# Altium PCB IRIS-FE-01-B.PcbDoc (part 2 of 2)
Units mil, origin at the board's own origin, x right, y up, seen from the top; angles counter-clockwise.
Board outline 2000 x 1540 mil, 6 copper layers (Top Layer 1, GND Plane 2, RF Layer 3, GND Plane 4, Signal Layer 5, Bottom Layer 6), stack 58.468 mil thick; 79 components, 85 nets, 421 pads, 413 vias.
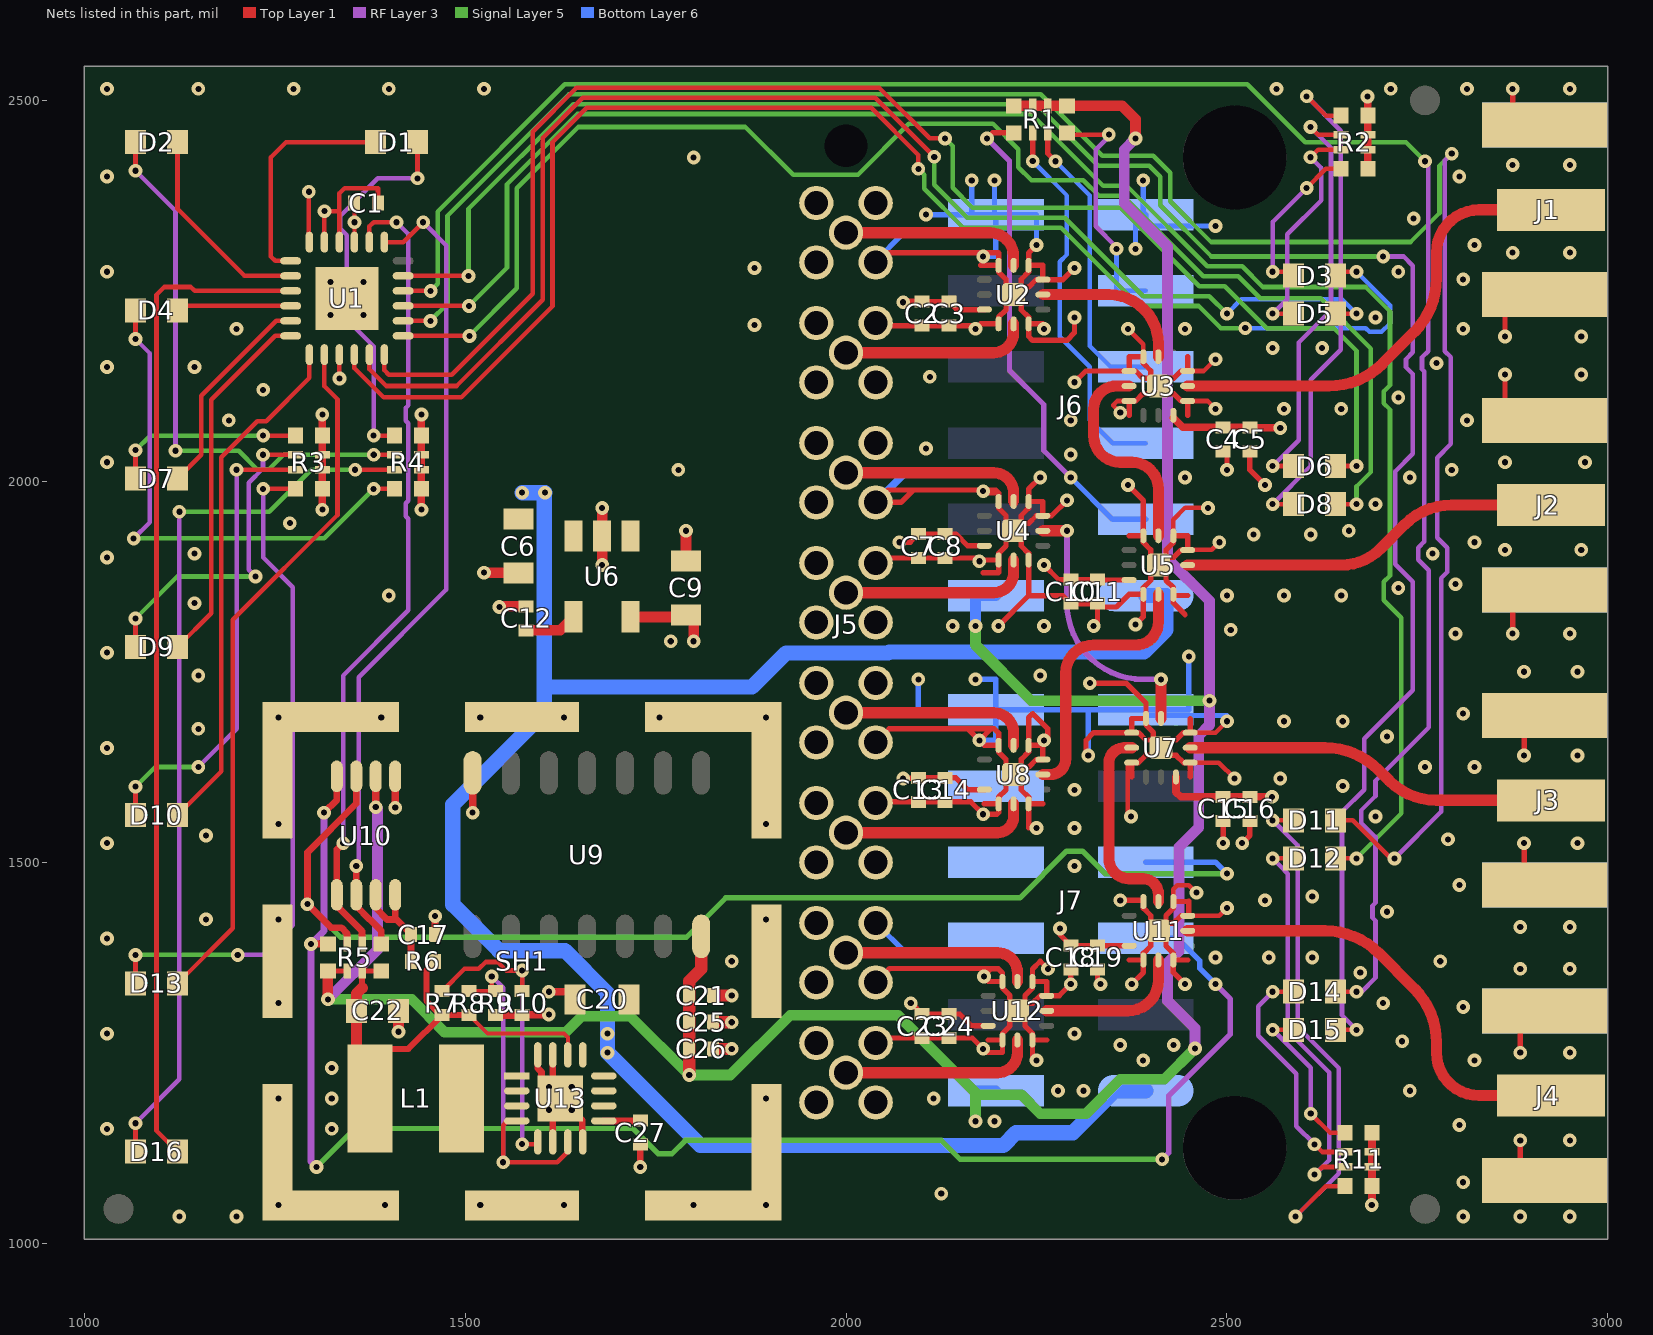
[diagram p6: the nets of this part, all layers, seen from the top]

## Via types
v1: diameter 18, hole 8, Top Layer 1 to Bottom Layer 6, tented both sides, 409 vias
v2: diameter 18, hole 8, Top Layer 1 to Bottom Layer 6, tented bottom, 4 vias

## Nets (pads, with @x,y where several pads share a name; then routed paths per layer and width w, separated by ;. In a path a pad name is that pad's centre, name@x,y a point inside that pad or via, vN(x,y) a via of type N, cw(c..) or ccw(c..) an arc to the next point about the centre after c; other vN are vias at no path point) (continued)
GND: C1.2 C2.2 C3.2 C4.2 C5.2 C6.2 C7.2 C8.2 C9.2 C10.2 C11.2 C12.1 C13.2 C14.2 C15.2 C16.2 C17.1 C18.2 C19.2 C20.1 C21.2 C22.2 C23.2 C24.2 C25.1 C26.2 C27.1 J1.2 J2.2 J3.2 J4.2 J5.GND J6.6 J6.12 J7.6 J7.12 R9.1 R10.1 SH1.SH U1.9 U1.22 U1.23 U1.24 U1.25 U2.3 U2.4 U2.6 U2.10 U2.12 U2.13 U3.3 U3.4 U3.6 U3.10 U3.12 U3.13 U4.3 U4.4 U4.6 U4.10 U4.12 U4.13 U5.3 U5.4 U5.6 U5.10 U5.12 U5.13 U6.2 U7.3 U7.4 U7.6 U7.10 U7.12 U7.13 U8.3 U8.4 U8.6 U8.10 U8.12 U8.13 U9.7 U10.1 U11.3 U11.4 U11.6 U11.10 U11.12 U11.13 U12.3 U12.4 U12.6 U12.10 U12.12 U12.13 U13.6 U13.8 U13.15 U13.16 U13.17 | length 9289.3
  Top Layer 1 w6: v1(1295,2380) 1295,2314.61 U1.24@1295.79,2313.82 ; U1.23@1315.47,2313.82 v1(1315.47,2354.53) 1334.69,2354.53 ; v1(1335.16,2135) U1.9@1335.16,2166.18 ; U1.22@1335.16,2313.82 1335.16,2377.76 1342.24,2384.84 1385.75,2384.84 C1.2@1385.75,2365 ; v1(2360,2090) 2351.07,2098.93 2351.07,2100.49 2355.9,2105.31 U3.6@2371.61,2105.31 ; v1@2370,1560 2370,1625.63 U7.6@2375,1630.63 ; v1(2370,2200) 2390.31,2179.69 U3.3@2390.31,2163.39 ; U11.4@2429.68,1448.39 2429.68,1464.68 2435,1470 2450,1470 v1(2460,1460) ; U5.4@2429.68,1928.39 2429.68,1949.68 2445,1965 v1(2475,1965) ; U11.3@2448.39,1429.69 2489.69,1429.69 v1(2500,1440) ; U5.3@2448.39,1909.69 2448.39,1910 2480,1910 v1(2490,1920) ; U3.10@2448.39,2105.31 2474.69,2105.31 v1(2485,2095) ; U3.12@2448.39,2144.68 2469.68,2144.68 v1(2485,2160) ; U7.10@2451.77,1630.63 2489.37,1630.63 v1(2510,1610) ; U7.12@2451.77,1670 2485,1670 v1(2500,1685)
  Top Layer 1 w7: J5.GND@2039,1262.74 2045.51,1269.25 C23.2@2100,1269.25 C24.2@2135,1269.25 2165.75,1269.25 v1(2180,1255) 2184.69,1250.31 2205.31,1250.31 U12.10@2205.31,1266.61 ; J5.GND@2039,1342.24 2057.26,1360.5 2199.5,1360.5 2200,1360 ; J5.GND@2039,1577.74 2040.51,1579.25 C13.2@2095,1579.25 C14.2@2130,1579.25 2163.75,1579.25 v1(2180,1563) 2198,1563 2200.31,1565.31 U8.10@2200.31,1576.61 ; J5.GND@2039,1657.24 2056.76,1675 2160,1675 ; J5.GND@2039,1892.74 2045.51,1899.25 C7.2@2095,1899.25 C8.2@2130,1899.25 2170.75,1899.25 v1(2175,1895) ; J5.GND@2039,2287.24 2051.76,2300 2200,2300 2200.31,2299.69 U2.6@2200.31,2283.39 ; J5.GND@2042.49,2204.25 C2.2@2100,2204.25 C3.2@2135,2204.25 2165.75,2204.25 v1(2170,2200) 2176.61,2206.61 U2.10@2200.31,2206.61 2200.32,2215.32 2210,2225 2210,2235 U2.13@2220,2245 U2.13@2230,2255 ; v1@2176.61,1896.61 U4.10@2200.31,1896.61 ; 2176.61,2283.39 U2.6@2200.31,2283.39 ; v1@2180,1350 2190,1360 2200,1360 ; 2180,1880 2200,1880 2200.31,1880.31 U4.10@2200.31,1896.61 ; 2181.61,1576.61 U8.10@2200.31,1576.61 ; 2181.61,1653.39 U8.6@2200.31,1653.39 ; 2186.61,1266.61 U12.10@2205.31,1266.61 ; v1@2186.61,1343.39 U12.6@2205.31,1343.39 ; v1(2200,1810) 2239.68,1849.68 ; U2.13@2210,2255 2210,2265 2200.32,2274.69 U2.6@2200.31,2283.39 ; U2.13@2230,2235 2230,2225 2239.69,2215.32 U2.12@2239.68,2206.61 ; U2.3@2249.69,2264.69 2240,2255 U2.13@2230,2255 ; v1(2250,1240) 2244.68,1245.32 U12.12@2244.68,1266.61 ; v1(2250,1545) 2239.68,1545 U8.12@2239.68,1576.61 ; v1(2250,2310) 2239.68,2299.68 U2.4@2239.68,2283.39 ; v1(2255,2005) 2239.68,1989.68 U4.4@2239.68,1973.39 ; 2258.39,1576.61 U8.12@2239.68,1576.61 ; v1@2258.39,2206.61 U2.12@2239.68,2206.61 ; 2263.39,1266.61 U12.12@2244.68,1266.61 ; v1(2265,1360) 2255,1370 2244.68,1359.68 U12.4@2244.68,1343.39 ; v1@2265,1660 2265,1675 2245,1695 2239.68,1689.68 U8.4@2239.68,1653.39 ; v1(2290,1975) 2269.69,1954.69 U4.3@2258.39,1954.69 ; C18.2@2295,1359.25 v1(2295,1340) 2279.69,1324.69 U12.3@2263.39,1324.69 ; v1(2300,2130) 2314.68,2144.68 U3.4@2371.61,2144.68 ; v1(2300,2215) 2300,2195 2290,2185 2245,2185 2239.68,2190.32 U2.12@2239.68,2206.61 ; v1(2300,2280) 2284.69,2264.69 U2.3@2258.39,2264.69 2258.39,2283.39 U2.4@2239.68,2283.39 ; v1@2315,1640 2315,1660 2325,1670 U7.4@2375,1670 ; v1@2315,1735 v1(2320,1735) 2367.4,1735 2393.7,1708.7 U7.3@2393.7,1688.7 ; v1(2325,1810) 2330,1815 C11.2@2330,1839.25 C10.2@2295,1839.25 2284.57,1849.68 2239.68,1849.68 ; v1@2330,1340 C19.2@2330,1359.25 ; 2340,1835 2355,1835 2371.61,1851.61 U5.10@2390.31,1851.61 ; v1(2360,1450) U11.6@2388.7,1450 ; v1(2370,1995) 2390.31,1974.69 U5.6@2390.31,1928.39 ; 2371.61,1371.61 U11.10@2390.31,1371.61 ; 2371.61,1928.39 U5.6@2390.31,1928.39 ; 2371.61,2086.61 U3.6@2371.61,2105.31 2380.31,2105.32 2390,2115 2400,2115 2420,2135 2430,2135 2439.68,2144.69 U3.12@2448.39,2144.68 2448.39,2163.39 ; v1(2375,1340) 2390.31,1355.31 U11.10@2390.31,1371.61 ; 2375,1611.93 U7.6@2375,1630.63 2383.7,1630.63 2393.39,1640.32 2403.39,1640.32 2423.39,1660.32 2433.39,1660.32 2443.07,1670 U7.12@2451.77,1670 2451.77,1688.7 ; v1(2380,1812) 2390.31,1822.31 U5.10@2390.31,1851.61 ; U11.6@2390.31,1448.39 2390.31,1439.69 2400,1430 2400,1420 U11.13@2410,1410 ; v1(2445,1340) 2429.68,1355.32 U11.12@2429.68,1371.61 ; 2445,1825 2429.68,1840.32 U5.12@2429.68,1850 ; 2448.39,1371.61 U11.12@2429.68,1371.61 ; U11.3@2448.39,1429.69 2439.68,1429.69 2430,1420 U11.13@2420,1420 ; 2448.39,1448.39 U11.4@2429.68,1448.39 2429.68,1439.69 2420,1430 U11.13@2420,1420 ; 2448.39,1850 U5.12@2429.68,1850 ; U5.3@2448.39,1909.69 2439.69,1909.69 2430,1900 U5.13@2420,1900 ; U5.3@2448.39,1910 2448.39,1928.39 U5.4@2429.68,1928.39 2429.69,1919.69 2420,1910 U5.13@2420,1900 ; 2448.39,2086.61 U3.10@2448.39,2105.31 2439.68,2105.32 2430,2115 2420,2115 U3.13@2410,2125 U3.13@2400,2135 ; U11.3@2450,1430 2450,1448.7 ; 2451.77,1611.93 U7.10@2451.77,1630.63 2443.07,1630.63 2433.39,1640.32 2423.39,1640.32 U7.13@2413.39,1650.32 U7.13@2403.39,1660.32 ; v1(2495,1525) C15.2@2495,1554.25 ; C4.2@2495,2039.25 2500,2034.25 v1(2500,2015) ; v1(2520,1525) 2530,1535 C16.2@2530,1554.25 ; C5.2@2530,2039.25 2530,2015 v1(2550,1995) ; v1(2865,2140) 2865,2095 2880.03,2079.97 J2.2@2917.32,2079.97 ; v1(2865,2190) 2865,2235 2875.03,2245.03 J1.2@2917.32,2245.03 ; v1(2875,1800) 2875,1850 2882.53,1857.53 J2.2@2917.32,1857.53 ; v1(2875,2515) 2875,2467.47 J1.2@2917.32,2467.47 ; v1(2885,1135) 2885,1090 2892.47,1082.53 J4.2@2917.32,1082.53 ; v1(2885,1250) 2885,1304.97 J4.2@2917.32,1304.97 ; v1(2890,1525) 2890,1480 2899.97,1470.03 J3.2@2917.32,1470.03 ; v1(2890,1640) 2890,1680 2902.47,1692.47 J3.2@2917.32,1692.47 ; 2088.5,1988.5 2072.24,1972.24 J5.GND@2039,1972.24 2055.26,1988.5 2088.5,1988.5 ; 2088.5,1988.5 v1@2178.5,1988.5 ; 2160,1675 v1(2175,1660) 2190,1675 ; 2160,1675 2190,1675 ; v1@2178.5,1988.5 2196.5,1988.5 2200.31,1984.69 ; v1@2178.5,1988.5 v1(2180,1987) 2182.31,1984.69 2200.31,1984.69 ; 2190,1675 2195,1675 2200.31,1669.69 U8.6@2200.31,1653.39 ; 2200,1360 2205.31,1354.69 U12.6@2205.31,1343.39 ; U8.10@2200.31,1576.61 2200.32,1585.32 2210,1595 2210,1605 U8.13@2220,1615 ; U8.6@2200.31,1653.39 2200.32,1644.69 2210,1635 2210,1625 U8.13@2220,1615 ; U4.10@2200.31,1896.61 2200.32,1905.32 2210,1915 2210,1925 U4.13@2220,1935 ; 2200.31,1984.69 U4.6@2200.31,1973.39 2200.32,1964.69 2210,1955 2210,1945 U4.13@2220,1935 ; U12.10@2205.31,1266.61 2205.32,1275.32 2215,1285 2215,1295 U12.13@2225,1305 ; U12.6@2205.31,1343.39 2205.32,1334.69 2215,1325 2215,1315 U12.13@2225,1305 ; U8.13@2220,1615 2230,1605 2230,1595 2239.69,1585.32 U8.12@2239.68,1576.61 ; U8.13@2220,1615 U8.13@2230,1625 ; U4.13@2220,1935 U4.13@2230,1945 ; U4.13@2220,1935 2230,1925 2230,1915 2239.69,1905.32 U4.12@2239.68,1896.61 2239.68,1849.68 ; U12.13@2225,1305 U12.13@2235,1315 ; U12.13@2225,1305 2235,1295 2235,1285 2244.69,1275.32 U12.12@2244.68,1266.61 ; U8.13@2230,1625 2230,1635 2239.69,1644.69 U8.4@2239.68,1653.39 ; U8.13@2230,1625 2240,1625 2249.69,1634.69 U8.3@2258.39,1634.69 2258.39,1653.39 U8.4@2239.68,1653.39 ; U4.13@2230,1945 2240,1945 2249.69,1954.69 U4.3@2258.39,1954.69 ; U4.13@2230,1945 2230,1955 2239.69,1964.69 U4.4@2239.68,1973.39 ; U2.13@2230,2255 2230,2265 2239.69,2274.69 U2.4@2239.68,2283.39 ; U12.13@2235,1315 2245,1315 2254.69,1324.69 U12.3@2263.39,1324.69 ; U12.13@2235,1315 2235,1325 2244.69,1334.69 U12.4@2244.68,1343.39 ; U4.4@2239.68,1973.39 2258.39,1973.39 U4.3@2258.39,1954.69 ; U12.4@2244.68,1343.39 2263.39,1343.39 U12.3@2263.39,1324.69 ; U3.4@2371.61,2144.68 2380.31,2144.69 2390,2135 U3.13@2400,2135 ; U3.4@2371.61,2144.68 2371.61,2163.39 U3.3@2390.31,2163.39 2390.31,2154.69 2400,2145 U3.13@2400,2135 ; U7.4@2375,1670 2375,1688.7 U7.3@2393.7,1688.7 ; U7.4@2375,1670 2383.7,1670 2393.39,1660.32 U7.13@2403.39,1660.32 ; U11.10@2390.31,1371.61 2390.31,1380.32 2400,1390 2400,1400 U11.13@2410,1410 ; U5.10@2390.31,1851.61 2390.32,1860.32 2400,1870 2400,1880 U5.13@2410,1890 ; U5.6@2390.31,1928.39 2390.32,1919.69 2400,1910 2400,1900 U5.13@2410,1890 ; U7.3@2393.7,1688.7 2393.7,1680 2403.39,1670.32 U7.13@2403.39,1660.32 ; U11.13@2410,1410 2420,1400 2420,1390 2429.68,1380.32 U11.12@2429.68,1371.61 ; U11.13@2410,1410 U11.13@2420,1420 ; U5.13@2410,1890 U5.13@2420,1900 ; U5.13@2410,1890 2420,1880 2420,1870 2429.69,1860.32 U5.12@2429.68,1851.61 U5.12@2429.68,1850
  Top Layer 1 w9: C17.1@1460.75,1405 v1(1460.75,1429.25) ; U13.16@1595.47,1249.17 U13.16@1595.47,1247.09 1595.47,1229.53 1600.24,1224.76 1600.24,1214.76 v1(1610,1205) 1615.16,1210.16 U13.15@1615.16,1247.09 ; v1(1610,1175) 1615.16,1169.84 U13.6@1615.16,1132.91 ; v1(1640,1175) 1653.85,1161.15 1653.85,1133.59 U13.8@1654.53,1132.91 ; v1(1730,1100) C27.1@1730,1129.25
  Top Layer 1 w10: v1(1408.39,1571.61) U10.1@1408.39,1612.76 ; v1(1510,1565) U9.7@1510,1617.28 ; R9.1@1540,1299.25 R10.1@1575,1299.25 1575.75,1300 v1(1610,1300) ; v1(1610,1330) C20.1@1644.57,1330
  Top Layer 1 w14: v1(1525,1880) C6.2@1570,1880 ; v1(1545,1835) cw(c1545.75,1835) 1545.75,1835.75 C12.1@1580,1835.75 ; v1(1680,1890) U6.2@1680,1928.15 v1(1680,1965) ; C9.2@1790,1895.43 v1(1790,1935)
  Top Layer 1 w14.67: v1(1412.56,1277.44) C22.2@1412.56,1305
  Top Layer 1 w16: C26.2@1825.75,1255 v1(1850,1255) ; C25.1@1825.75,1290 v1(1850,1290) ; C21.2@1825.75,1325 v1(1850,1325)
  Bottom Layer 6 w7: J5.GND@2039,1420.24 2079.24,1380 2080,1380 ; J5.GND@2042.24,2287.24 J5.GND@2039,2287.24 2039,2289 2075,2325 ; v1(2095,1740) 2095,1700 J7.12@2196.57,1700 ; v1(2105,2350) J6.12@2165,2350 ; v1(2165,2395) J6.12@2165,2350 ; v1(2170,1740) 2196.57,1740 J7.12@2196.57,1700 ; v1(2175,1660) 2196.57,1660 J7.12@2196.57,1700 ; v1(2180,2295) 2196.57,2295 J6.12@2196.57,2350 ; v1(2195,2395) J6.12@2195,2350 ; v1(2250,2310) 2250,2350 J6.12@2196.57,2350 ; v1(2318,1640) 2318,1700 ; v1(2380,2305) 2380,2350 J6.6@2393.43,2350 ; v1(2390,2395) 2390,2353.43 J6.6@2393.43,2350 ; v1(2450,1770) 2450,1700 J7.6@2393.43,1700 ; v1(2485,2335) 2393.43,2335 J6.6@2393.43,2350 ; v1(2500,1685) 2500,1692.5 2393.43,1692.5 J7.6@2393.43,1700 ; J6.12@2165,2350 J6.12@2195,2350 ; J6.12@2195,2350 J6.12@2196.57,2350 ; J7.12@2196.57,1700 2318,1700 ; 2318,1700 J7.6@2393.43,1700
  Bottom Layer 6 w10: J5.GND@2039,1972.24 2075,2008.24
  other v1: 1125,1035 1200,1035 2810,1035 2885,1035 2950,1035 1255,1050 1395,1050 1520,1050 1630,1050 1800,1050 1895,1050 2125,1065 2810,1080 2950,1135 1030,1150 2805,1155 2195,1160 1255,1190 1895,1190 2115,1190 2278.15,1200 2311.85,1200 2740,1200 1640,1205 2390,1240 2825,1240 2950,1250 2360,1260 2430,1260 2730,1265 1030,1275 2300,1275 2810,1310 1255,1315 2705,1315 2334,1340 2181,1350 2675,1355 2885,1360 2950,1360 1850,1370 2780,1370 2485,1375 2555,1375 2612,1375 1030,1400 2885,1415 2950,1415 1160,1425 1255,1425 1895,1425 2710,1435 2550,1450 2612,1455 2805,1470 2300,1495 1030,1525 2960,1525 2790,1530 1160,1535 2300,1545 1255,1550 1895,1550 2374,1560 2695,1560 2300,1595 2652,1600 2570,1610 2760,1625 2825,1625 2960,1640 1030,1650 2260,1660 2710,1665 1150,1675 2575,1685 2652,1685 1255,1690 1390,1690 1520,1690 1630,1690 1755,1690 1895,1690 2810,1695 1150,1745 2255,1745 2890,1750 2960,1750 1030,1775 2800,1800 2950,1800 2505,1805 2140,1810 2260,1810 1145,1840 1400,1850 2500,1850 2575,1850 2650,1850 2725,1860 2800,1865 1030,1900 1145,1905 2770,1905 2865,1910 2965,1910 2825,1920 2535,1930 2610,1930 2660,1935 1270,1945 2695,1970 2445,2005 2740,2005 1780,2015 2795,2015 1030,2025 2865,2025 2970,2025 2295,2035 2105,2043 1190,2080 2295,2080 2815,2080 2575,2095 2650,2095 2725,2110 1235,2120 2110,2137 2965,2140 1030,2150 1145,2150 2775,2155 2560,2175 2625,2175 2965,2190 1200,2200 2260,2200 2445,2200 2810,2200 1880,2205 2695,2215 2810,2265 1030,2275 2725,2275 1880,2280 2875,2300 2950,2300 2825,2310 2745,2345 1030,2400 2805,2400 2875,2415 2950,2415 1800,2425 1030,2515 1150,2515 1275,2515 1400,2515 1525,2515 2565,2515 2715,2515 2815,2515 2950,2515
  other v2: 1323.35,2218.35 1366.65,2218.35 1323.35,2261.65 1366.65,2261.65
I2C_CLK: J7.4 R5.2 U10.3 | length 1673.1
  Top Layer 1 w9: R5.2@1345.16,1392.72 1345.16,1406.47 1337.57,1414.06 1323.94,1414.06 v1(1293,1445) 1293,1513 1357.2,1577.2 U10.3@1357.2,1612.76
  Signal Layer 5 w7: v1(1293,1445) 1336.5,1401.5 1790.42,1401.5 1842.16,1453.24 2228.24,1453.24 2289.5,1514.5 2310.5,1514.5 2340,1485 v1(2500,1485)
  Bottom Layer 6 w7: J7.4@2393.43,1500 2485,1500 v1(2500,1485)
I2C_CLK_C: R5.4 U1.19 U10.6 | length 1084.2
  Top Layer 1 w6: U1.19@1394.21,2313.82 1418.82,2313.82 v1(1445,2340)
  Top Layer 1 w9: v1(1357.2,1495) U10.6@1357.2,1457.24 1357.2,1442.64 1374.77,1425.07 1374.93,1425.07 1389.94,1410.06 R5.4@1389.94,1392.72
  RF Layer 3 w6: v1(1357.2,1495) 1360.5,1498.3 1360.5,1742.87 1475.5,1857.87 1475.5,2309.5 v1(1445,2340)
I2C_DATA: J7.3 R5.1 U10.4 | length 2112
  Top Layer 1 w9: v1(1297.72,1392.72) R5.1@1320.06,1392.72 ; v1(1315,1565) 1331.61,1581.61 U10.4@1331.61,1612.76
  RF Layer 3 w7: v1(2415,1110) 2423.5,1118.5 2423.5,1193.4 2504.5,1274.4 2504.5,1320.5 v1(2485,1340)
  RF Layer 3 w9: v1(1305,1100) 1297.72,1107.28 v1(1297.72,1392.72) 1315,1410 v1(1315,1565)
  Signal Layer 5 w7: v1(1305,1100) 1355.5,1150.5 1720.51,1150.5 1753.77,1117.24 1771.34,1117.24 1789.1,1135 2125,1135 2150,1110 v1(2415,1110)
  Bottom Layer 6 w7: J7.3@2393.43,1400 2435,1400 2464.5,1370.5 2464.5,1360.5 v1(2485,1340)
I2C_DATA_C: R5.3 U1.20 U10.5 | length 1070.2
  Top Layer 1 w6: U1.20@1374.53,2313.82 1374.53,2334.53 1380,2340 v1(1410,2340)
  Top Layer 1 w9: v1(1340,1525) 1331.61,1516.61 U10.5@1331.61,1457.24 1331.61,1442.64 1364.84,1409.41 R5.3@1364.84,1392.72
  RF Layer 3 w6: v1(1340,1525) 1340,1745 1425.5,1830.5 1425.5,1950.94 1422.22,1954.23 1422.22,1971.21 1425.5,1974.49 1425.5,2075.94 1422.22,2079.23 1422.22,2096.21 1425.5,2099.49 1425.5,2324.5 v1(1410,2340)
LED_BLU_A1: D1.1 R4.8 | length 503.2
  Top Layer 1 w6: v1(1380.06,2059.94) R4.8@1407.28,2059.94 ; v1(1437.56,2397.56) D1.1@1437.56,2445
  RF Layer 3 w6: v1(1380.06,2059.94) 1380.06,2176.88 1345,2211.94 1345,2322.97 1335.84,2332.13 1335.84,2347.87 1385.53,2397.56 v1(1437.56,2397.56)
LED_BLU_K1: D1.2 U1.1 | length 304.3
  Top Layer 1 w6: U1.1@1271.18,2289.21 1250.79,2289.21 1245,2295 1245,2425 1265,2445 D1.2@1382.44,2445
LED_GRN_A1: D2.1 R4.7 | length 731.9
  Top Layer 1 w6: v1(1067.44,2407.56) D2.1@1067.44,2445 ; v1(1380.16,2034.84) R4.7@1407.28,2034.84
  RF Layer 3 w6: v1(1067.44,2407.56) 1120,2355 v1(1120,2040)
  Signal Layer 5 w6: v1(1120,2040) 1202.82,2040 1226.97,2015.84 1242.71,2015.84 1261.71,2034.84 v1(1380.16,2034.84)
LED_GRN_A2: D16.1 R4.6 | length 1169
  Top Layer 1 w6: D16.1@1067.44,1120 v1(1067.44,1157.44) ; v1(1355.72,2015.16) R4.6@1407.28,2015.16
  RF Layer 3 w6: v1(1067.44,1157.44) 1125,1215 v1(1125,1960)
  Signal Layer 5 w6: v1(1125,1960) 1243,1960 1298.16,2015.16 v1(1355.72,2015.16)
LED_GRN_K1: D2.2 U1.2 | length 272.6
  Top Layer 1 w6: D2.2@1122.56,2445 1122.56,2357.44 1210.47,2269.53 U1.2@1271.18,2269.53
LED_GRN_K2: D16.2 U1.3 | length 1318.9
  Top Layer 1 w6: D16.2@1122.56,1120 1095,1147.56 1095,2245 1105,2255 1140,2255 1145.16,2249.84 U1.3@1271.18,2249.84
LED_GRN_RFA_A: D5.1 R2.6 | length 308.9
  Top Layer 1 w6: v1(2560,2220) D5.1@2587.44,2220 ; v1(2609.57,2425.22) 2619.57,2435.22 R2.6@2649.57,2435.22
  RF Layer 3 w6: v1(2560,2220) 2579,2239 2579,2324 2623.57,2368.57 2623.57,2411.22 v1(2609.57,2425.22)
LED_GRN_RFA_K: D5.2 U1.11 | length 1786.8
  Top Layer 1 w6: U1.11@1374.53,2166.18 1374.53,2147.09 1396.62,2125 1488.79,2125 1601.79,2238 1601.79,2450.57 1654.41,2503.2 2038.41,2503.2 v1(2115.81,2425.81) ; D5.2@2642.56,2220 v1(2670,2220)
  Signal Layer 5 w6: v1(2115.81,2425.81) 2115.81,2389.19 2159,2346 2287.13,2346 2390.13,2243 2477,2243 v1(2500,2220)
  Bottom Layer 6 w6: v1(2500,2220) 2519,2239 2651,2239 v1(2670,2220)
LED_GRN_RFB_A: D8.1 R2.8 | length 673.8
  Top Layer 1 w6: v1(2560,1970) D8.1@2587.44,1970 ; v1(2604.57,2505.22) 2629.78,2480 R2.8@2649.57,2480
  RF Layer 3 w6: v1(2560,1970) 2610,2020 2610,2133.13 2649.57,2172.7 2649.57,2460.22 v1(2604.57,2505.22)
LED_GRN_RFB_K: D8.2 U1.13 | length 1889.7
  Top Layer 1 w6: U1.13@1418.82,2190.79 v1(1505.79,2190.79) ; D8.2@2642.56,1970 v1(2670,1970)
  Signal Layer 5 w6: v1(1505.79,2190.79) 1568.08,2253.08 1568.08,2384.54 1648.54,2465 1868,2465 1930.76,2402.24 2015.74,2402.24 2082.5,2469 2192.87,2469 2226.16,2435.71 2226.16,2412.29 2243.45,2395 2311.62,2395 2332.04,2374.57 2363.4,2374.57 2468.98,2269 2514.62,2269 2543.62,2240 2623.13,2240 2689,2174.13 2689,2012.13 2670,1993.13 v1(2670,1970)
LED_GRN_RFC_A: D12.1 R11.6 | length 525.1
  Top Layer 1 w6: v1(2560,1505) D12.1@2587.44,1505 ; v1(2615,1090) 2625,1100 R11.6@2655,1100
  RF Layer 3 w6: v1(2560,1505) 2570,1495 2580,1485 2580,1278.38 2634,1224.38 2634,1109 v1(2615,1090)
LED_GRN_RFC_K: D12.2 U1.15 | length 2360.4
  Top Layer 1 w6: U1.15@1418.82,2230.16 v1(1505.16,2230.16) ; D12.2@2642.56,1505 v1(2670,1505)
  Signal Layer 5 w6: v1(1505.16,2230.16) 1555.08,2280.08 1555.08,2389.92 1647.15,2482 2243,2482 2337.43,2387.57 2368.79,2387.57 2474.36,2282 2520,2282 2547,2255 2681.87,2255 2714,2222.87 2714,2125.87 2706,2117.87 2706,2102.13 2714,2094.13 2714,1875.87 2706,1867.87 2706,1844 2729,1821 2729,1564 v1(2670,1505)
LED_GRN_RFD_A: D15.1 R11.8 | length 213.6
  Top Layer 1 w6: v1(2560,1280) D15.1@2587.44,1280 ; v1(2610,1170) 2635.22,1144.78 R11.8@2655,1144.78
  RF Layer 3 w6: v1(2560,1280) 2610,1230 v1(2610,1170)
LED_GRN_RFD_K: D15.2 U1.17 | length 2683.1
  Top Layer 1 w6: U1.17@1418.82,2269.53 v1(1504.53,2269.53) ; D15.2@2642.56,1280 v1(2670,1280)
  RF Layer 3 w6: v1(2670,1280) 2651,1299 2651,1566 2680,1595 2680,1661.87 2744,1725.87 2744,1867.87 2721,1890.87 2721,2012.87 2744,2035.87 2744,2140.75 2735,2149.75 2735,2160.25 2744,2169.25 2744,2282.87 2731.87,2295 v1(2705,2295)
  Signal Layer 5 w6: v1(1504.53,2269.53) 1504.53,2357.76 1641.77,2495 2250,2495 2331,2414 2397.87,2414 2412.43,2399.44 2412.43,2362.32 2479.75,2295 v1(2705,2295)
LED_RED_A1: D4.1 R4.5 | length 685.1
  Top Layer 1 w6: v1(1067.44,2186.73) D4.1@1067.44,2224.17 ; v1(1380.06,1990.06) R4.5@1407.28,1990.06
  RF Layer 3 w6: v1(1065,1925) 1086.44,1946.44 1086.44,2167.73 v1(1067.44,2186.73)
  Signal Layer 5 w6: v1(1065,1925) 1315,1925 v1(1380.06,1990.06)
LED_RED_A2: D7.1 R3.8 | length 255.2
  Top Layer 1 w6: D7.1@1067.44,2003.33 v1(1067.44,2040.77) ; v1(1235.06,2059.94) R3.8@1277.28,2059.94
  Signal Layer 5 w6: v1(1067.44,2040.77) 1086.61,2059.94 v1(1235.06,2059.94)
LED_RED_A3: D9.1 R3.7 | length 431.6
  Top Layer 1 w6: D9.1@1067.44,1782.5 v1(1067.44,1819.94) ; v1(1234.84,2034.84) R3.7@1277.28,2034.84
  RF Layer 3 w6: v1(1225,1875) 1216.06,1883.94 1216.06,1997.93 1234.84,2016.71 v1(1234.84,2034.84)
  Signal Layer 5 w6: v1(1067.44,1819.94) 1122.5,1875 v1(1225,1875)
LED_RED_A4: D10.1 R3.6 | length 618.8
  Top Layer 1 w6: D10.1@1067.44,1561.67 v1(1067.44,1599.11) ; v1(1200.16,2015.16) R3.6@1277.28,2015.16
  RF Layer 3 w6: v1(1150,1625) 1200.16,1675.16 v1(1200.16,2015.16)
  Signal Layer 5 w6: v1(1067.44,1599.11) 1093.33,1625 v1(1150,1625)
LED_RED_A5: D13.1 R3.5 | length 891.4
  Top Layer 1 w6: D13.1@1067.44,1340.83 v1(1067.44,1378.27) ; v1(1235.06,1990.06) R3.5@1277.28,1990.06
  RF Layer 3 w6: v1(1201.73,1378.27) 1235.14,1378.27 1274,1417.13 1274,1861 1235.06,1899.94 v1(1235.06,1990.06)
  Signal Layer 5 w6: v1(1067.44,1378.27) v1(1201.73,1378.27)
LED_RED_K1: D4.2 U1.4 | length 142.6
  Top Layer 1 w6: D4.2@1128.55,2230.16 U1.4@1271.18,2230.16
LED_RED_K2: D7.2 U1.5 | length 279.9
  Top Layer 1 w6: D7.2@1122.56,2003.33 1154,2034.77 1154,2112.38 1252.09,2210.47 U1.5@1271.18,2210.47
LED_RED_K3: D9.2 U1.6 | length 481.8
  Top Layer 1 w6: D9.2@1122.56,1782.5 1167,1826.94 1167,2107 1250.79,2190.79 U1.6@1271.18,2190.79
LED_RED_K4: D10.2 U1.7 | length 683.2
  Top Layer 1 w6: D10.2@1122.56,1561.67 1180,1619.11 1180,2031.75 1227.19,2078.94 1238.94,2078.94 1295.79,2135.79 U1.7@1295.79,2166.18
LED_RED_K5: D13.2 U1.8 | length 919.4
  Top Layer 1 w6: D13.2@1122.56,1340.83 1195,1413.27 1195,1818.13 1332.56,1955.69 1332.56,2107.44 1315.47,2124.53 U1.8@1315.47,2166.18
LED_RED_RFA_A: D3.1 R2.5 | length 216.2
  Top Layer 1 w6: v1(2560,2275) D3.1@2587.44,2275 ; v1(2604.57,2384.9) 2629.78,2410.12 R2.5@2649.57,2410.12
  RF Layer 3 w6: v1@2560,2270 2560,2340.33 v1(2604.57,2384.9)
LED_RED_RFA_K: D3.2 U1.10 | length 1938
  Top Layer 1 w6: U1.10@1354.84,2166.18 1354.84,2148.39 1393.23,2110 1495,2110 1614.79,2229.79 1614.79,2445.19 1659.8,2490.2 2033.03,2490.2 2095,2428.23 v1(2095,2410) ; D3.2@2642.56,2275 v1(2670,2275)
  Signal Layer 5 w6: v1(2095,2410) 2102.81,2402.19 2102.81,2383.81 2153.62,2333 2281.75,2333 2384.75,2230 2463.13,2230 2492.13,2201 v1(2524,2201)
  Bottom Layer 6 w6: v1(2524,2201) 2682.13,2201 2687.13,2196 2702.87,2196 2714,2207.13 2714,2231 v1(2670,2275)
LED_RED_RFB_A: D6.1 R2.7 | length 559.4
  Top Layer 1 w6: v1(2560,2020) D6.1@2587.44,2020 ; v1(2609.57,2464.9) 2619.57,2454.9 R2.7@2649.57,2454.9
  RF Layer 3 w6: v1(2560,2020) 2594,2054 2594,2182.13 2636.57,2224.7 2636.57,2437.9 v1(2609.57,2464.9)
LED_RED_RFB_K: D6.2 U1.12 | length 1932.8
  Top Layer 1 w6: U1.12@1394.21,2166.18 1394.21,2145.79 1400,2140 1482.57,2140 1588.79,2246.21 1588.79,2458.79 1646.2,2516.2 2043.8,2516.2 2110,2450 v1(2130,2450) ; D6.2@2642.56,2020 v1(2670,2020)
  Signal Layer 5 w6: v1(2130,2450) 2140,2440 2140,2385 2166,2359 2360.59,2359 2463.59,2256 2497.13,2256 2552.13,2201 2640.46,2201 2670,2171.46 v1(2670,2020)
LED_RED_RFC_A: D11.1 R11.5 | length 701.6
  Top Layer 1 w6: v1(2560,1555) D11.1@2587.44,1555 ; v1(2590,1035) 2629.9,1074.9 R11.5@2655,1074.9
  RF Layer 3 w6: v1(2560,1555) 2593,1522 2593,1283.77 2647,1229.77 2647,1092 ; v1(2590,1035) 2647,1092 ; 2647,1105 2647,1092
LED_RED_RFC_K: D11.2 U1.14 | length 2837.3
  Top Layer 1 w6: U1.14@1418.82,2210.47 v1(1454.53,2210.47) ; D11.2@2642.56,1555 2665,1555 2720,1500 v1(2720,1505)
  RF Layer 3 w6: v1(2720,1505) 2781,1566 2781,1872.87 2789,1880.87 2789,1912.87 2776,1925.87 2776,2031 2794,2049 2794,2162.87 2786,2170.87 2786,2421 v1(2795,2430)
  Signal Layer 5 w6: v1(1454.53,2210.47) 1477,2232.94 1477,2348.62 1636.38,2508 2255.38,2508 2336.38,2427 2403.25,2427 2425.43,2404.83 2425.43,2367.7 2479.13,2314 2740.87,2314 2779,2352.13 2779,2414 v1(2795,2430) v1@2790,2430
LED_RED_RFD_A: D14.1 R11.7 | length 310.4
  Top Layer 1 w6: v1(2560,1330) D14.1@2587.44,1330 ; v1(2615,1129.68) 2625,1119.68 R11.7@2655,1119.68
  RF Layer 3 w6: v1(2560,1330) 2541,1311 2541,1272.13 2591,1222.13 2591,1153.68 v1(2615,1129.68)
LED_RED_RFD_K: D14.2 U1.16 | length 2746.2
  Top Layer 1 w6: U1.16@1418.82,2249.84 v1(1454.84,2249.84) ; D14.2@2642.56,1330 v1(2670,1330)
  RF Layer 3 w6: v1(2670,1330) 2676.87,1330 2695,1348.13 2695,1423.13 2691,1427.13 2691,1442.87 2695,1446.87 2695,1533.13 2676,1552.13 2676,1567.87 2695,1586.87 2695,1606.87 2765,1676.87 2765,1883.13 2751,1897.13 2751,1912.87 2759,1920.87 2759,2144.13 2756,2147.13 2756,2162.87 2764,2170.87 2764,2416 v1(2760,2420)
  Signal Layer 5 w6: v1(1454.84,2249.84) 1464,2259 1464,2354 1631,2521 2526.6,2521 2602.6,2445 2735,2445 v1(2760,2420)
NetC12_2: C12.2 U6.4 | length 69.9
  Top Layer 1 w14: C12.2@1580,1804.25 1625,1804.25 U6.4@1642.6,1821.85
NetC17_2: C17.2 R6.1 U10.7 U10.8 | length 144.4
  Top Layer 1 w9: U10.7@1382.8,1457.24 1382.8,1439.83 1397.63,1425 1410,1425 1429.25,1405.75 C17.2@1429.25,1405 R6.1@1429.25,1370 ; 1408.39,1426.61 U10.8@1408.39,1457.24
NetC27_2: C27.2 U13.9 | length 47.6
  Top Layer 1 w9: U13.9@1682.09,1160.47 C27.2@1729.72,1160.47
NetR7_1: R7.1 R10.2 U13.5 | length 402.1
  Top Layer 1 w6: R7.1@1470,1330.75 1499.25,1360 1518.13,1360 1527.13,1369 1542.87,1369 1554,1357.87 v1(1575,1357.87) R10.2@1575,1330.75 ; v1(1575,1130) 1592.56,1130 U13.5@1595.47,1132.91
  RF Layer 3 w6: v1(1575,1130) v1(1575,1357.87)
PWRGD_3P3: R8.1 R9.2 U13.4 U13.7 | length 479
  Top Layer 1 w6: R8.1@1505,1330.75 R9.2@1540,1330.75 1535,1335.75 v1(1535,1350) ; U13.4@1567.91,1160.47 1555.47,1160.47 1550,1155 v1(1550,1106.18) 1621.26,1106.18 1634.84,1119.77 U13.7@1634.84,1132.91
  RF Layer 3 w6: v1(1535,1350) 1550,1335 v1(1550,1106.18)
RF_RXA: U2.2 U3.2 | length 205.3
  Top Layer 1 w14.67: U2.2@2258.39,2245 2345,2245 cw(c2345,2180) 2410,2180 U3.2@2410,2163.39
RF_RXA_C: U3.5 U5.5 | length 285.3
  Top Layer 1 w14.67: U3.5@2371.61,2125 2355,2125 ccw(c2355,2095) 2325,2095 2325,2060 ccw(c2360,2060) 2360,2025 2375,2025 cw(c2375,1990) 2410,1990 U5.5@2410,1928.39
RF_RXB: U4.2 U7.2 | length 360
  Top Layer 1 w14.67: U4.2@2258.39,1935 v1(2290,1935) ; U7.2@2413.39,1688.7 v1(2413.39,1740)
  RF Layer 3 w7.45: v1(2290,1935) 2290,1840 ccw(c2390,1840) 2390,1740 v1(2413.39,1740) v1@2413.39,1741.61
RF_RXB_C: U7.5 U11.5 | length 268.1
  Top Layer 1 w14.67: U7.5@2375,1650.32 2365.32,1650.32 ccw(c2365.32,1630) 2345,1630 2345,1505 ccw(c2371.61,1505) 2371.61,1478.39 2389.68,1478.39 cw(c2389.68,1458.07) 2410,1458.07 U11.5@2410,1448.39
RF_TXA: U5.11 U8.2 | length 350.9
  Top Layer 1 w14.67: U8.2@2258.39,1615 2268.07,1615 ccw(c2268.07,1635.32) 2288.39,1635.32 2288.39,1748.39 cw(c2325,1748.39) 2325,1785 2380,1785 ccw(c2380,1815) 2410,1815 U5.11@2410,1851.61
RF_TXB: U11.11 U12.2 | length 196.1
  Top Layer 1 w14.67: U12.2@2263.39,1305 2370,1305 ccw(c2370,1345) 2410,1345 U11.11@2410,1371.61
RFANT_RX_A: J1.1 U3.11 | length 616.7
  Top Layer 1 w14.67: U3.11@2448.39,2125 2633.58,2125 ccw(c2633.58,2225) 2704.29,2154.29 2745.71,2195.71 ccw(c2675,2266.42) 2775,2266.42 2775,2300 cw(c2831.25,2300) 2831.25,2356.25 J1.1@2925.2,2356.25
RFANT_RX_B: J3.1 U7.11 | length 494
  Top Layer 1 w14.67: U7.11@2451.77,1650.32 2628.26,1650.32 cw(c2628.26,1550.32) 2698.97,1621.03 2713.12,1606.88 ccw(c2775,1668.77) 2775,1581.25 J3.1@2925.2,1581.25
RFANT_TXRX_A: J2.1 U5.2 | length 502.5
  Top Layer 1 w14.67: U5.2@2448.39,1890 2650,1890 ccw(c2650,1962.43) 2701.21,1911.21 2733.12,1943.12 cw(c2795,1881.23) 2795,1968.75 J2.1@2925.2,1968.75
RFANT_TXRX_B: J4.1 U11.2 | length 598.8
  Top Layer 1 w14.67: U11.2@2448.39,1410 2628.58,1410 cw(c2628.58,1310) 2699.29,1380.71 2745.71,1334.29 cw(c2675,1263.58) 2775,1263.58 2775,1250 ccw(c2831.25,1250) 2831.25,1193.75 J4.1@2925.2,1193.75
RFMOD_GPIO_14: J7.9
RFMOD_GPIO_15: J7.10
RFMOD_GPIO_16: J7.11
RFMOD_ID_0: J6.2 R1.8 | length 649.8
  Top Layer 1 w7: v1(2185,2450) 2192.28,2457.28 R1.8@2220.06,2457.28
  RF Layer 3 w7: v1(2185,2450) 2214.5,2420.5 2214.5,2145.5 2259.5,2100.5 2259.5,2040.5 v1(2295,2005)
  Bottom Layer 6 w7: v1(2295,2005) 2350,1950 J6.2@2393.43,1950
RFMOD_ID_1: J6.3 R1.7 | length 501.9
  Top Layer 1 w7: v1(2245.16,2420.16) R1.7@2245.16,2457.28
  Bottom Layer 6 w6: v1@2245,2420 2290,2375 2290,2297.58 2280.5,2288.08 2280.5,2189.5 2319.93,2150.07 2319.93,2080.07 2350,2050 J6.3@2393.43,2050
RFMOD_ID_2: J6.4 R1.6 | length 387.5
  Top Layer 1 w7: R1.6@2264.84,2457.28 2264.84,2430.16 v1(2275,2420)
  Bottom Layer 6 w6: v1(2275,2420) 2319.93,2375.07 2319.93,2177.51 2347.44,2150 J6.4@2393.43,2150
RFMOD_ID_3: J6.5 R1.5 | length 317.9
  Top Layer 1 w6: R1.5@2289.94,2457.28 2292.22,2455 v1(2345,2455)
  RF Layer 3 w6: v1(2345,2455) 2345,2452.28 2327.72,2435 2327.72,2334.59 2355,2307.3 v1(2355,2305)
  Bottom Layer 6 w6: v1(2355,2305) 2355,2250 J6.5@2393.43,2250
RXA_HI: J5.1 U2.5 | length 249.4
  Top Layer 1 w14.67: J5.1@2000,2326.24 2188.76,2326.24 cw(c2188.76,2295) 2220,2295 U2.5@2220,2283.39
RXA_LO: J5.2 U2.11 | length 246.6
  Top Layer 1 w14.67: J5.2@2000,2168.74 2193.74,2168.74 ccw(c2193.74,2195) 2220,2195 U2.11@2220,2206.61
RXB_HI: J5.3 U4.5 | length 246.6
  Top Layer 1 w14.67: J5.3@2000,2011.24 2193.76,2011.24 cw(c2193.76,1985) 2220,1985 U4.5@2220,1973.39
RXB_LO: J5.4 U4.11 | length 251.6
  Top Layer 1 w14.67: J5.4@2000,1853.74 2193.74,1853.74 ccw(c2193.74,1880) 2220,1880 U4.11@2220,1896.61
SWN5: L1.1 U13.1 U13.2 U13.3
TXA_HI: J5.5 U8.5 | length 251.6
  Top Layer 1 w14.67: J5.5@2000,1696.24 2193.76,1696.24 cw(c2193.76,1670) 2220,1670 U8.5@2220,1653.39
TXA_LO: J5.6 U8.11 | length 248.7
  Top Layer 1 w14.67: J5.6@2000,1538.74 2198.74,1538.74 ccw(c2198.74,1560) 2220,1560 U8.11@2220,1576.61
TXB_HI: J5.7 U12.5 | length 251.6
  Top Layer 1 w14.67: J5.7@2000,1381.24 2198.76,1381.24 cw(c2198.76,1355) 2225,1355 U12.5@2225,1343.39
TXB_LO: J5.8 U12.11 | length 256.6
  Top Layer 1 w14.67: J5.8@2000,1223.74 2198.74,1223.74 ccw(c2198.74,1250) 2225,1250 U12.11@2225,1266.61
VCC_33: C2.1 C3.1 C4.1 C5.1 C7.1 C8.1 C9.1 C10.1 C11.1 C13.1 C14.1 C15.1 C16.1 C18.1 C19.1 C23.1 C24.1 U2.9 U3.9 U4.9 U5.9 U6.5 U7.9 U8.9 U11.9 U12.9 | length 1080.5
  Top Layer 1 w7: v1(2070,1920) 2084.25,1920 C7.1@2095,1930.75 C8.1@2130,1930.75 2144.25,1930.75 2159.68,1915.32 U4.9@2181.61,1915.32 ; v1(2075,1610) 2094.25,1610 C13.1@2095,1610.75 C14.1@2130,1610.75 2144.25,1610.75 2159.68,1595.32 U8.9@2181.61,1595.32 ; v1@2085.75,1315 C23.1@2100,1300.75 C24.1@2135,1300.75 2149.25,1300.75 2164.68,1285.32 U12.9@2186.61,1285.32 ; C2.1@2100,2235.75 C3.1@2135,2235.75 2145.43,2225.32 U2.9@2181.61,2225.32 ; v1(2260,1890) 2279.25,1870.75 C10.1@2295,1870.75 C11.1@2330,1870.75 ; v1(2281,1413) 2281,1404.75 C18.1@2295,1390.75 C19.1@2330,1390.75 ; C11.1@2330.43,1870.32 U5.9@2371.61,1870.32 ; C19.1@2335.75,1390 2336.06,1390.32 U11.9@2371.61,1390.32
  Top Layer 1 w10: v1(2075,2235) C2.1@2099.25,2235 ; U3.9@2429.68,2083.39 2441.97,2071.11 2494.63,2071.11 C4.1@2495,2070.75 C5.1@2530,2070.75 2530.75,2070 v1(2570,2070) ; U7.9@2433.07,1611.93 2433.07,1591.93 2439.25,1585.75 C15.1@2495,1585.75 C16.1@2530,1585.75 v1(2559.25,1585.75)
  Top Layer 1 w14: U6.5@1717.4,1821.85 C9.1@1787.28,1821.85 ; C9.1@1790,1824.57 1800,1814.57 v1(1800,1790)
  other v1: 2085,1315 1770,1790
VCC_33_LED: C1.1 C22.1 L1.2 R2.1 R2.2 R2.3 R2.4 R3.1 R3.2 R3.3 R3.4 R4.1 R4.2 R4.3 R4.4 R5.5 R5.6 R6.2 R7.2 R8.2 R11.1 R11.2 R11.3 R11.4 U1.21 U13.14 | length 1159.1
  Top Layer 1 w5: C1.1@1354.25,2365 1354.84,2364.41 U1.21@1354.84,2313.82 ; R8.2@1505,1299.25 1529.25,1275 1630,1275 1635,1270 1635,1247.24 U13.14@1634.84,1247.09
  Top Layer 1 w7: R5.6@1365,1357.13 R5.5@1389.78,1357.13
  Top Layer 1 w8: 1365,1335 R5.6@1365,1357.13 ; L1.2@1374.96,1200 1374.96,1255 1425.75,1255 R7.2@1470,1299.25 ; R5.5@1389.78,1357.13 R5.5@1389.94,1357.28 ; R6.2@1460.75,1370 1449.16,1358.41 1449.16,1318.32 1468.22,1299.25 R7.2@1470,1299.25 ; R8.2@1505,1299.25 R7.2@1470,1299.25
  Top Layer 1 w10: v1(1312.72,1962.72) R3.4@1312.72,1990.06 R3.3@1312.72,2015.16 R3.2@1312.72,2034.84 R3.1@1312.72,2059.94 v1(1312.72,2087.72) ; v1(1442.72,1962.72) R4.4@1442.72,1990.06 R4.3@1442.72,2015.16 R4.2@1442.72,2034.84 R4.1@1442.72,2059.94 v1(1442.72,2087.72) ; R2.4@2685,2410.12 R2.3@2685,2435.22 R2.2@2685,2454.9 R2.1@2685,2480 v1@2685,2504.47 ; v1@2690.43,1050.43 R11.4@2690.43,1074.9 R11.3@2690.43,1100 R11.2@2690.43,1119.68 R11.1@2690.43,1144.78
  Top Layer 1 w14.67: 1365,1335 1357.44,1327.44 C22.1@1357.44,1305 1357.44,1207.52 ccw(c1374.96,1207.52) L1.2@1374.96,1190 L1.2@1374.96,1200
  other v1: 2690,1050 1325,1150 1325,1190 1325,1230 1354.84,2340 2684.57,2504.9
VCCO_35: C21.1 C25.2 C26.1 J6.7 J7.7 R1.1 R1.2 R1.3 R1.4 R5.7 R5.8 U9.14 U10.2 | length 3899.4
  Top Layer 1 w7: R5.8@1320,1357.22 1345.1,1357.22 R5.7@1345.16,1357.28
  Top Layer 1 w10: v1(1382.8,1572.2) U10.2@1382.8,1612.76
  Top Layer 1 w14: v1(1320,1320) R5.8@1320,1357.22 ; R1.1@2220.06,2492.72 R1.2@2245.16,2492.72 R1.3@2264.84,2492.72 R1.4@2289.94,2492.72 2362.28,2492.72 2380,2475 v1(2380,2450)
  Top Layer 1 w16: v1(1794.25,1220.75) C26.1@1794.25,1255 C25.2@1794.25,1290 C21.1@1794.25,1325 1794.25,1344.25 1810,1360 U9.14@1810,1402.72
  RF Layer 3 w14: v1(1320,1320) 1385,1385 1385,1570 v1(1382.8,1572.2) ; v1(2380,2450) 2365,2435 2365,2365 2422,2308 2422,1898 2477,1843 2477,1680 2463,1666 2463,1545.47 2437,1519.47 2437,1383 2422,1368 2422,1318 2458,1282 v1(2458,1255.47)
  Signal Layer 5 w14: v1(1320,1320) 1430,1320 1473,1277 1632,1277 1653,1298 1717,1298 v1(1794.25,1220.75) 1848.27,1220.75 1926.77,1299.24 2068.23,1299.24 2170,1197.47 ; v1(2170,1160) 2170,1197.47 ; v1(2170,1810) 2170,1785 2243,1712 v1(2477,1712) ; v1(2458,1255.47) 2417.53,1215 2360,1215 2315,1170 2255,1170 2230,1195 2172.47,1195 2170,1197.47
  Bottom Layer 6 w14: v1(2170,1160) 2170,1200 J7.7@2196.57,1200 ; v1(2170,1810) 2170,1850 J6.7@2196.57,1850
VIN: C6.1 C20.2 J6.1 J7.1 U6.1 U6.3 U13.10 U13.11 U13.12 U13.13 | length 2655.3
  Bottom Layer 6 w20: v1(1575,1985) v1(1605,1985) 1604,1984 1604,1730 ; J7.1@2393.43,1200 2353,1200 2298,1145 2223.23,1145 2206.47,1128.24 1808.76,1128.24 v1(1687,1250) v1(1687,1275) 1687,1328 1631.13,1383.87 1544.36,1383.87 1484,1444.23 1484,1575.77 1604,1695.77 1604,1730 ; J6.1@2393.43,1850 2420,1850 2420,1805 2391,1776 2056.62,1776 2055.36,1774.74 1921.5,1774.74 1876.76,1730 1604,1730
pads on no net: F1.0 F2.0 F3.0 J5. U2.1 U3.1 U4.1 U5.1 U7.1 U8.1 U11.1 U12.1

## Polygon pours and split planes (outlines as drawn)
GND on Top Layer 1 "GND_L01_P010" (solid, remove dead copper, pour order 10): 1000,2550 1000,1000 3000,1000 3000,2550
VIN on Top Layer 1 "VIN_L01_P004" (solid, remove dead copper, pour order 4): 1550,1940 1550,1985 cw(c1565,1985) 1565,2000 1715,2000 cw(c1715,1985) 1730,1985 1730,1910 1625,1910 cw(c1625,1925) 1610,1925 ccw(c1595,1925) 1595,1940
GND on RF Layer 3 "GND_L03_P006" (solid, remove dead copper, pour order 6): 2225,1990 2330,1990 2465,1805 2465,1685 2225,1685
GND on Bottom Layer 6 "GND_L06_P008" (solid, remove dead copper, pour order 8): 1000,2550 1000,1000 3000,1000 3000,2550
GND on GND Plane 2 (split plane): 2979.9,1025.1 1020.1,1025.1 1020.1,2524.9 2979.9,2524.9
VCC_33 on GND Plane 4 (split plane): 2979.9,1025.1 2725.09,1025.1 2725.09,1063 2724.72,1069.73 2723.59,1076.37 2721.72,1082.85 2719.14,1089.07 2715.88,1094.97 2711.98,1100.47 2707.49,1105.49 2702.47,1109.98 2696.97,1113.88 2691.07,1117.14 2684.85,1119.72 2678.37,1121.59 2671.73,1122.72 2665,1123.09 1945,1123.09 1944.64,1123.04 1939.78,1123.36 1934.65,1124.38 1929.7,1126.06 1925.01,1128.37 1920.66,1131.28 1916.73,1134.73 1913.28,1138.66 1910.37,1143.01 1908.06,1147.7 1906.38,1152.65 1905.36,1157.78 1905.04,1162.64 1905.09,1163 1905.09,1640 1904.72,1646.73 1903.59,1653.37 1901.72,1659.85 1899.14,1666.07 1895.88,1671.97 1891.98,1677.47 1887.49,1682.49 1882.47,1686.98 1876.97,1690.88 1871.07,1694.14 1864.85,1696.72 1858.37,1698.59 1851.73,1699.72 1845,1700.09 1685,1700.09 1684.64,1700.04 1679.78,1700.36 1674.65,1701.38 1669.7,1703.06 1665.01,1705.37 1660.66,1708.28 1656.73,1711.73 1653.28,1715.66 1650.37,1720.01 1648.06,1724.7 1646.38,1729.65 1645.36,1734.78 1645.04,1739.64 1645.09,1740 1645.09,2200 1645.09,2375 1645.04,2375.36 1645.36,2380.22 1646.38,2385.35 1648.06,2390.3 1650.37,2394.99 1653.28,2399.34 1656.73,2403.27 1660.66,2406.72 1665.01,2409.63 1669.7,2411.94 1674.65,2413.62 1679.78,2414.64 1684.64,2414.96 1685,2414.91 2250,2414.91 2250.36,2414.96 2255.22,2414.64 2260.35,2413.62 2265.3,2411.94 2269.99,2409.63 2274.34,2406.72 2278.27,2403.27 2281.72,2399.34 2284.63,2394.99 2286.94,2390.3 2288.62,2385.35 2289.64,2380.22 2289.96,2375.36 2289.91,2375 2289.91,2305 2290.28,2298.27 2291.41,2291.63 2293.28,2285.15 2295.86,2278.93 2299.12,2273.03 2303.02,2267.53 2307.51,2262.51 2312.53,2258.02 2318.03,2254.12 2323.93,2250.86 2330.15,2248.28 2336.63,2246.41 2343.27,2245.28 2350,2244.91 2665,2244.91 2671.73,2245.28 2678.37,2246.41 2684.85,2248.28 2691.07,2250.86 2696.97,2254.12 2702.47,2258.02 2707.49,2262.51 2711.98,2267.53 2715.88,2273.03 2719.14,2278.93 2721.72,2285.15 2723.59,2291.63 2724.72,2298.27 2725.09,2305 2725.09,2524.9 2979.9,2524.9
VCC_33_LED on GND Plane 4 (split plane): 2704.91,2305 2704.96,2304.64 2704.64,2299.78 2703.62,2294.65 2701.94,2289.7 2699.63,2285.01 2696.72,2280.66 2693.27,2276.73 2689.34,2273.28 2684.99,2270.37 2680.3,2268.06 2675.35,2266.38 2670.22,2265.36 2665.36,2265.04 2665,2265.09 2350,2265.09 2349.64,2265.04 2344.78,2265.36 2339.65,2266.38 2334.7,2268.06 2330.01,2270.37 2325.66,2273.28 2321.73,2276.73 2318.28,2280.66 2315.37,2285.01 2313.06,2289.7 2311.38,2294.65 2310.36,2299.78 2310.04,2304.64 2310.09,2305 2310.09,2375 2309.72,2381.73 2308.59,2388.37 2306.72,2394.85 2304.14,2401.07 2300.88,2406.97 2296.98,2412.47 2292.49,2417.49 2287.47,2421.98 2281.97,2425.88 2276.07,2429.14 2269.85,2431.72 2263.37,2433.59 2256.73,2434.72 2250,2435.09 1685,2435.09 1678.27,2434.72 1671.63,2433.59 1665.15,2431.72 1658.93,2429.14 1653.03,2425.88 1647.53,2421.98 1642.51,2417.49 1638.02,2412.47 1634.12,2406.97 1630.86,2401.07 1628.28,2394.85 1626.41,2388.37 1625.28,2381.73 1624.91,2375 1624.91,2200 1624.91,1740 1625.28,1733.27 1626.41,1726.63 1628.28,1720.15 1630.86,1713.93 1634.12,1708.03 1638.02,1702.53 1642.51,1697.51 1647.53,1693.02 1653.03,1689.12 1658.93,1685.86 1665.15,1683.28 1671.63,1681.41 1678.27,1680.28 1685,1679.91 1845,1679.91 1845.36,1679.96 1850.22,1679.64 1855.35,1678.62 1860.3,1676.94 1864.99,1674.63 1869.34,1671.72 1873.27,1668.27 1876.72,1664.34 1879.63,1659.99 1881.94,1655.3 1883.62,1650.35 1884.64,1645.22 1884.96,1640.36 1884.91,1640 1884.91,1163 1885.28,1156.27 1886.41,1149.63 1888.28,1143.15 1890.86,1136.93 1894.12,1131.03 1898.02,1125.53 1902.51,1120.51 1907.53,1116.02 1913.03,1112.12 1918.93,1108.86 1925.15,1106.28 1931.63,1104.41 1938.27,1103.28 1945,1102.91 2665,1102.91 2665.36,1102.96 2670.22,1102.64 2675.35,1101.62 2680.3,1099.94 2684.99,1097.63 2689.34,1094.72 2693.27,1091.27 2696.72,1087.34 2699.63,1082.99 2701.94,1078.3 2703.62,1073.35 2704.64,1068.22 2704.96,1063.36 2704.91,1063 2704.91,1025.1 1020.1,1025.1 1020.1,2524.9 2704.91,2524.9

## Other copper
Top Layer 1:
  rectangle net GND: 2039,2190.49 2155,2214.16
  rectangle net GND: 2034,1875.49 2150,1899.16
  rectangle net GND: 2039,1560.49 2155,1584.16
  rectangle net GND: 2049,1245.49 2165,1269.16
  rectangle net GND: 2035,1971.54 2078.46,1990
  rectangle net GND: 1643.91,1100 1675,1110.29
  rectangle net GND: 2270,1821.75 2349.84,1839.25
  pour cut-out: 1407.56,1305 1400,1286.81 1407.56,1279.25 1427.61,1279.25 1427.61,1276.55 1429.52,1274.63 1421.1,1266.22 1373.71,1266.22 1370,1269.92 1370,1320 1382.47,1340.44 1407.56,1340.44
  pour cut-out: 1425,1320 1425,1290 1435,1280 1435,1280.11 1449.75,1294.87 1449.75,1305.25 1435,1320
  region net SWN5: 1515,1260 1520,1260 cw(c1520,1240) 1540,1240 ccw(c1557.5,1242.5) 1555,1225 1580,1225 cw(c1580,1220) 1585,1220 1585,1180 cw(c1580,1180) 1580,1175 1555,1175 ccw(c1555,1160) 1540,1160 1540,1140 cw(c1520,1140) 1520,1120 1515,1120
  region net VCC_33_LED: 1360,1260 1325,1260 ccw(c1325,1240) 1305,1240 1305,1140 ccw(c1325,1140) 1325,1120 1360,1120
  region net VIN: 1675,1285 1680,1285 ccw(c1680,1305) 1700,1305 1700,1340 1730,1340 1730,1195 cw(c1710,1195) 1710,1175 1670,1175 cw(c1670,1180) 1665,1180 1665,1225 ccw(c1660,1225) 1660,1230 1655,1230 cw(c1655,1235) 1650,1235 1650,1265 cw(c1670,1265) 1670,1285
  region net VCC_33: 1710,1850 ccw(c1710,1840) 1700,1840 1700,1785 ccw(c1710,1785) 1710,1775 1805,1775 ccw(c1805,1785) 1815,1785 1815,1840 ccw(c1805,1840) 1805,1850
  pour cut-out: 1045,1083.33 cw(c1045,1045.06) 1083.27,1045.06 1083.27,1044.55 cw(c1045.39,1044.55) 1045.39,1006.67 1045,1006.67 cw(c1045,1045) 1006.67,1045 cw(c1045,1045)
  pour cut-out: 2760,1083.33 cw(c2760,1045.06) 2798.27,1045.06 2798.27,1044.55 cw(c2760.39,1044.55) 2760.39,1006.67 2760,1006.67 cw(c2760,1045) 2721.67,1045 cw(c2760,1045)
  pour cut-out: 2760,2538.33 cw(c2760,2500.06) 2798.27,2500.06 2798.27,2499.55 cw(c2760.39,2499.55) 2760.39,2461.67 2760,2461.67 cw(c2760,2500) 2721.67,2500 cw(c2760,2500)
Bottom Layer 6:
  rectangle net VIN: 1560,1955 1625,2015
  rectangle net VIN: 1664.64,1225 1710,1305
  pour cut-out: 1045,1083.33 cw(c1045,1045.06) 1083.27,1045.06 1083.27,1044.55 cw(c1045.39,1044.55) 1045.39,1006.67 1045,1006.67 cw(c1045,1045) 1006.67,1045 cw(c1045,1045)
  pour cut-out: 2760,1083.33 cw(c2760,1045.06) 2798.27,1045.06 2798.27,1044.55 cw(c2760.39,1044.55) 2760.39,1006.67 2760,1006.67 cw(c2760,1045) 2721.67,1045 cw(c2760,1045)
  pour cut-out: 2760,2538.33 cw(c2760,2500.06) 2798.27,2500.06 2798.27,2499.55 cw(c2760.39,2499.55) 2760.39,2461.67 2760,2461.67 cw(c2760,2500) 2721.67,2500 cw(c2760,2500)
GND Plane 4 (plane layer: these items are gaps in the copper):
  pour cut-out: 2565,2515 2574.78,2505.22 2604.57,2505.22 2609.57,2500.22 2609.57,2454.57 2580,2425 2530,2475
  pour cut-out: 1323.35,2261.65 1366.65,2261.65 1366.65,2218.35 1323.35,2218.35
  pour cut-out: 2000,1223.74 1961,1184.74 1961,1156 1960,1155 2040,1155 2040,1183.74
  lines w20: 2715,1000 2715,1063 ccw(c2665,1063) 2665,1113 1945,1113 cw(c1945,1163) 1895,1163 1895,1640 ccw(c1845,1640) 1845,1690 1685,1690 cw(c1685,1740) 1635,1740 1635,2200 1635,2375 cw(c1685,2375) 1685,2425 2250,2425 cw(c2250,2375) 2300,2375 2300,2305 ccw(c2350,2305) 2350,2255 2665,2255 ccw(c2665,2305) 2715,2305 2715,2550

## Silkscreen, mask and mechanical layers (free items; w line width, h text height)
Top Overlay:
  text "RXA" at 2805,2280 h60 r90
  text "IRIS-FE-01 / (c) Skylark Wireless LLC / Revision B / ID = 1111" at 1785,2080 h30 r90
  text "TRXA" at 2805,1860 h60 r90
  text "RXB" at 2810,1505 h60 r90
  text "TRXB" at 2810,1090 h60 r90
Bottom Overlay:
  region: 1510,2495 1510,1745 1760,1745 1760,2495
Mechanical 1:
  the board outline again, w5
  text "NOTES / 1. Dimenstions in mils. / 2. RoHS Process Required. / 3. ENIG Finish. / 4. Tabs or v-groove on long (2\") edge MUST have burrs sanded. / 5. Controlled impedence: 50 Ohm Top Layer, 14.668 mil /                         50 Ohm RF Layer 3, 7.449 mil / 6. Ventec VT-47 material. / 7. OK to de-panel after assembly." at 3735,1610 h60
Mechanical 3:
  the board outline again, w5
Mechanical 13:
  lines w5: 1000,1005 1000,2550 2995,2550 3000,2545 3000,1005 1000,1005
Drill Drawing:
  lines w10: 1007.29,3419.17 1073.96,3419.17 1040.62,3352.5 1007.29,3419.17 ; 1007.29,3502.5 1040.62,3519.17 1073.96,3502.5 1057.29,3535.83 1073.96,3569.17 1040.62,3552.5 1007.29,3569.17 1023.96,3535.83 1007.29,3502.5 ; 1007.29,3652.5 1073.96,3652.5 1073.96,3719.17 1007.29,3719.17 1007.29,3652.5 ; 1007.29,3819.17 1023.96,3819.17 1023.96,3802.5 1057.29,3802.5 1057.29,3819.17 1073.96,3819.17 1073.96,3852.5 1057.29,3852.5 1057.29,3869.17 1023.96,3869.17 1023.96,3852.5 1007.29,3852.5 1007.29,3819.17
  lines w15: 947.5,3307.5 11778.49,3307.5 ; 947.5,3907.5 11778.49,3907.5 ; 1498.38,3157.5 1498.38,4057.5 ; 2098.22,3157.5 2098.22,4057.5 ; 3247.88,3157.5 3247.88,4057.5 ; 3753.76,3157.5 3753.76,4057.5 ; 4487.56,3157.5 4487.56,4057.5 ; 6227.03,3157.5 6227.03,4057.5 ; 6816.88,3157.5 6816.88,4057.5 ; 7562.68,3157.5 7562.68,4057.5 ; 8212.51,3157.5 8212.51,4057.5 ; 9066.27,3157.5 9066.27,4057.5 ; 10399.88,3157.5 10399.88,4057.5 ; 947.5,3157.5 11778.49,3157.5 11778.49,4057.5 947.5,4057.5 947.5,3157.5
  text "Symbol" at 1037.5,3952.5 h72
  text "Count" at 1543.38,3952.5 h72
  text "Hole Size" at 2143.22,3952.5 h72
  text "Plated" at 3292.88,3952.5 h72
  text "Hole Type" at 3798.76,3952.5 h72
  text "Drill Layer Pair" at 4532.56,3952.5 h72
  text "Via/Pad" at 6272.03,3952.5 h72
  text "Pad Shape" at 6861.88,3952.5 h72
  text "Template" at 7607.68,3952.5 h72
  text "Description" at 8257.51,3952.5 h72
  text "Hole Tolerance (+)" at 9111.27,3952.5 h72
  text "Hole Tolerance (-)" at 10444.88,3952.5 h72
  text "1" at 1543.38,3802.5 h60
  text "56.00mil (1.422mm)" at 2143.22,3802.5 h60
  text "NPTH" at 3292.88,3802.5 h60
  text "Round" at 3798.76,3802.5 h60
  text "Top Layer 1 - Bottom Layer 6" at 4532.56,3802.5 h60
  text "Pad" at 6272.03,3802.5 h60
  text "Rounded" at 6861.88,3802.5 h60
  text "c0hn142" at 7607.68,3802.5 h60
  text "2" at 1543.38,3652.5 h60
  text "136.00mil (3.454mm)" at 2143.22,3652.5 h60
  text "NPTH" at 3292.88,3652.5 h60
  text "Round" at 3798.76,3652.5 h60
  text "Top Layer 1 - Bottom Layer 6" at 4532.56,3652.5 h60
  text "Pad" at 6272.03,3652.5 h60
  text "Rounded" at 6861.88,3652.5 h60
  text "c345hn345" at 7607.68,3652.5 h60
  text "40" at 1543.38,3502.5 h60
  text "31.00mil (0.787mm)" at 2143.22,3502.5 h60
  text "PTH" at 3292.88,3502.5 h60
  text "Round" at 3798.76,3502.5 h60
  text "Top Layer 1 - Bottom Layer 6" at 4532.56,3502.5 h60
  text "Pad" at 6272.03,3502.5 h60
  text "Rounded" at 6861.88,3502.5 h60
  text "c114h79" at 7607.68,3502.5 h60
  text "413" at 1543.38,3352.5 h60
  text "8.00mil (0.203mm)" at 2143.22,3352.5 h60
  text "PTH" at 3292.88,3352.5 h60
  text "Round" at 3798.76,3352.5 h60
  text "Top Layer 1 - Bottom Layer 6" at 4532.56,3352.5 h60
  text "Via" at 6272.03,3352.5 h60
  text "Rounded" at 6861.88,3352.5 h60
  text "(Mixed)" at 7607.68,3352.5 h60
  text "456 Total" at 1543.38,3202.5 h60

## Dimensions
2510,1125 to 3000,1005 on Mechanical 1
1000,2545 to 1000,1005 on Mechanical 1
2000,2326.24 to 3000,2545 on Mechanical 1
3000,2545 to 1000,2545 on Mechanical 1
2510,2425 to 3377.4,2481.25 on Mechanical 1
2510,2425 to 3000,2545 on Mechanical 1

## Text inside footprints (layer, text, board x,y; h text height)
J2: Mechanical 1 "J1" at 3150,1949.18 h30 r90
J3: Mechanical 1 "J1" at 3150,1561.68 h30 r90
J4: Mechanical 1 "J1" at 3150,1174.18 h30 r90